# EAGLE board modulev2 (EAGLE 9.5.1)
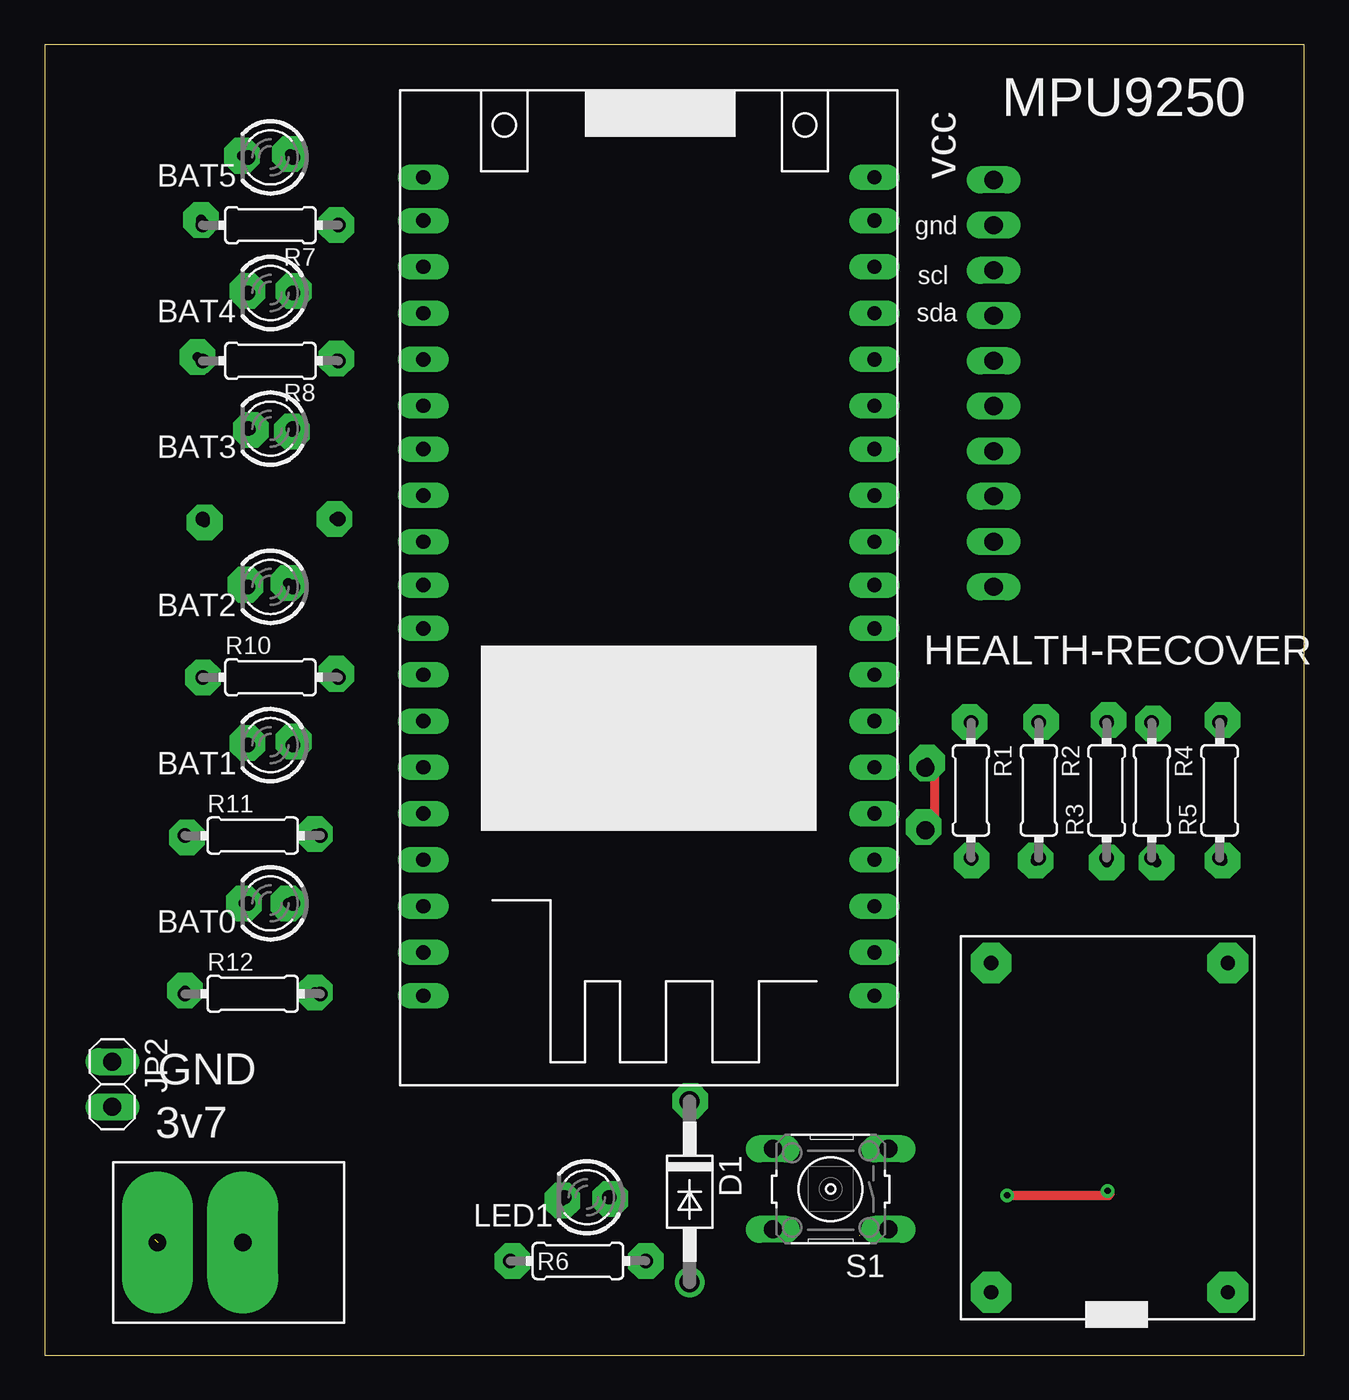
[diagram p0: board, top side]
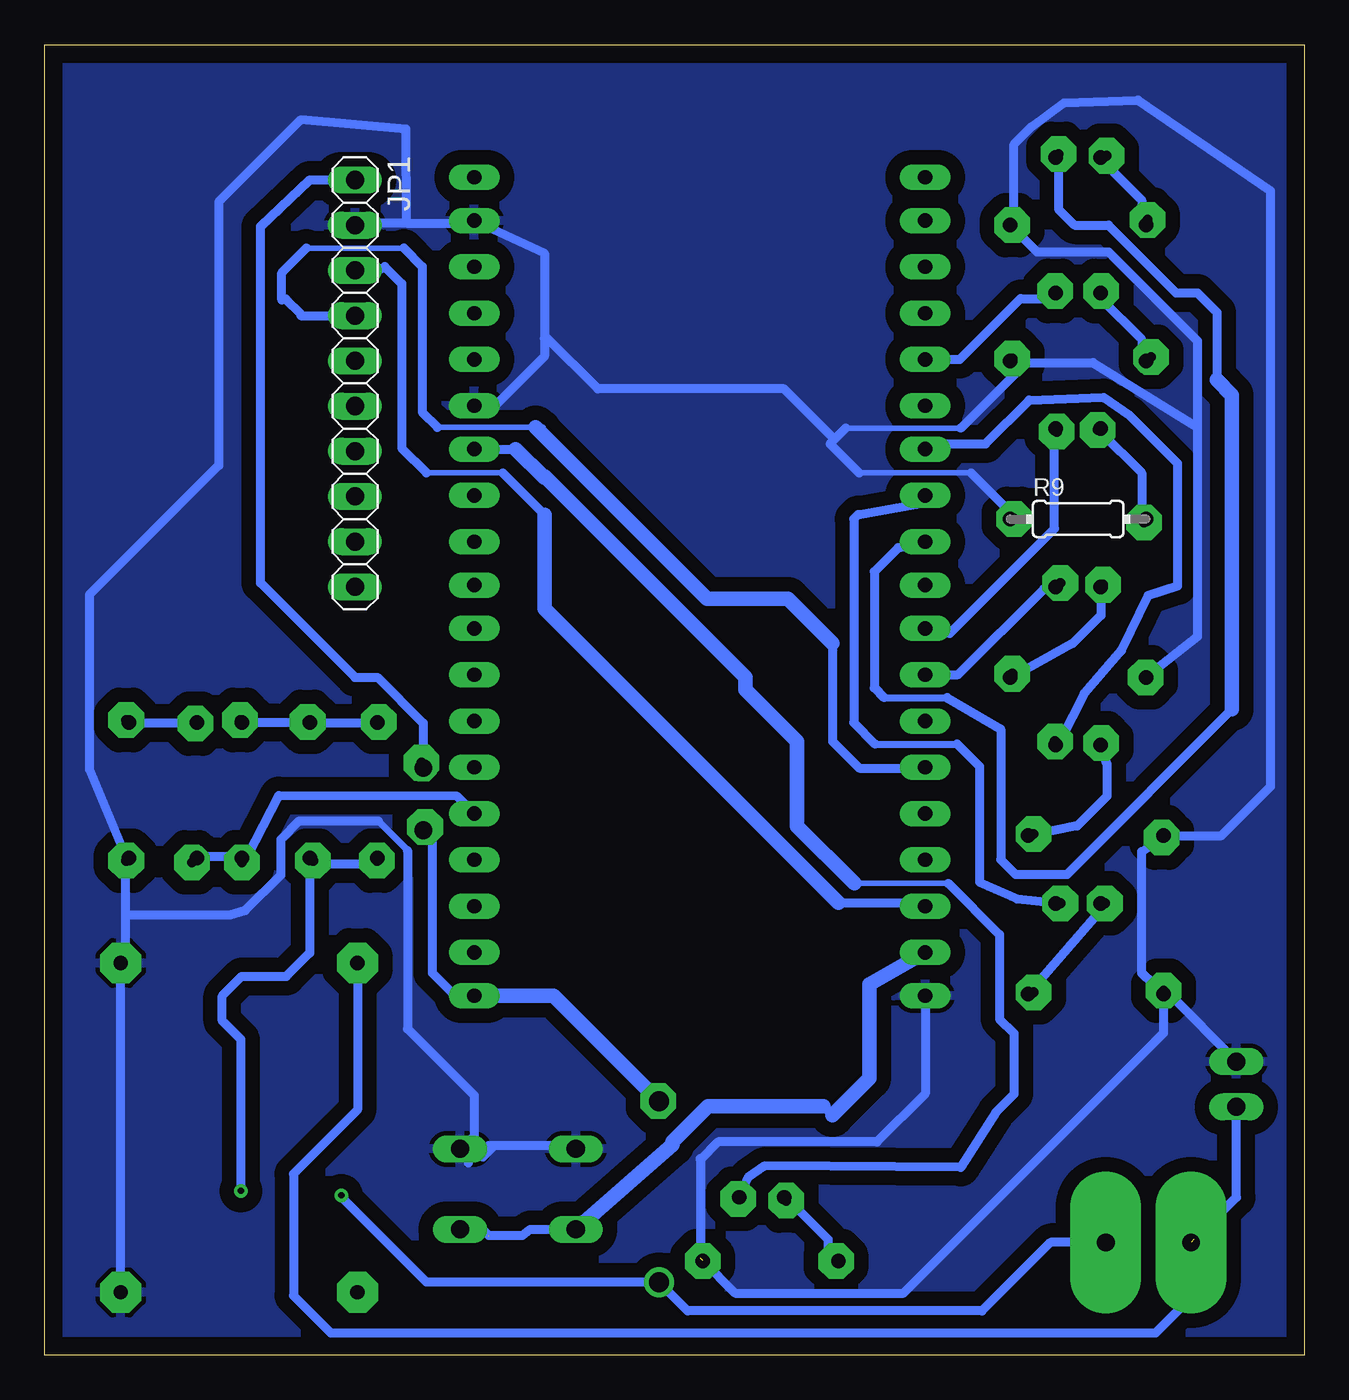
[diagram p1: board, bottom side, seen from below]

Size 70.79 x 73.65 mm. Coordinates in mm from the lower left corner, seen from the top.
Outline: 0,0 70.79,0 70.79,73.65 0,73.65 0,0
Copper layers (1*16): Top 0.035mm / dielectric 1.5mm / Bottom 0.035mm
Design rules "default": minimum track width 6mil, minimum drill 0.35mm, track to track 6mil, track to pad 6mil, pad to pad 6mil, via to via 6mil, smd to smd 6mil, copper to edge 40mil, drill to drill 6mil, minimum pad ring 10mil, minimum via ring 8mil, stop-mask expansion 4mil, vias tented up to drill 0mil, thermal gap 10mil
Net classes: 0 default: width 0.5 mm

## Footprints (pad centres in the part's own frame; a part is rotated, then mirrored left to right if it is on the bottom)
LED3MM = drill 0.813 octagon: A -1.27,0; K 1.27,0
DO41-10 = drill 1.118: A 5.08,0; C -5.08,0
1X10 = drill 1.016 long: 1 -11.43,0; 2 -8.89,0; 3 -6.35,0; 4 -3.81,0; 5 -1.27,0; 6 1.27,0; 7 3.81,0; 8 6.35,0; 9 8.89,0; 10 11.43,0
1X02 = drill 1.016 long: 1 -1.27,0; 2 1.27,0
0204/7 = drill 0.813 octagon: 1 -3.81,0; 2 3.81,0
B3F-10XX = drill 1.016 long: 1 -3.251,2.261; 2 3.251,2.261; 3 -3.251,-2.261; 4 3.251,-2.261
ESP32-WORMM2 = drill 0.8 pad 1.422 long: 1 -13,20.475; 2 -13,18.038; 3 -13,15.438; 4 -13,12.838; 5 -13,10.238; 6 -13,7.638; 7 -13,5.2; 8 -13,2.6; 9 -13,0; 10 -13,-2.438; 11 -13,-4.875; 12 -13,-7.475; 13 -13,-10.075; 14 -13,-12.675; 15 -13,-15.275; 16 -13,-17.875; 17 -13,-20.475; 18 -13,-23.075; 19 -13,-25.512; 20 12.35,-25.512; 21 12.35,-23.075; 22 12.35,-20.475; 23 12.35,-17.875; 24 12.35,-15.275; 25 12.35,-12.675; 26 12.35,-10.075; 27 12.35,-7.475; 28 12.35,-4.875; 29 12.35,-2.438; 30 12.35,0; 31 12.35,2.6; 32 12.35,5.2; 33 12.35,7.638; 34 12.35,10.238; 35 12.35,12.838; 36 12.35,15.438; 37 12.35,18.038; 38 12.35,20.475
CHARGET_MODULE = drill 0.8 pad 2.3 octagon: 1 9.15,6.81; 2 -9.35,6.81; 3 -9.35,-6.49; 4 9.15,-6.49
MINI_SWITCH = drill 1 pad 4 long: 1 0,0; 2 4.8,0

## Placement (x,y rotation side)
BAT0  led_indicator  [LED3MM]  12.7,25.4 180 top
BAT1  led_indicator  [LED3MM]  12.7,34.29 180 top
BAT2  led_indicator  [LED3MM]  12.7,43.18 180 top
BAT3  led_indicator  [LED3MM]  12.7,52.07 180 top
BAT4  led_indicator  [LED3MM]  12.7,59.69 180 top
BAT5  led_indicator  [LED3MM]  12.7,67.31 180 top
D1  1N4004  [DO41-10]  36.26,9.2 270 top
JP1  [1X10]  53.34,54.61 270 bottom
JP2  [1X02]  3.81,15.24 270 top
LED1  led_indicator  [LED3MM]  30.48,8.89 180 top
R1  33k  [0204/7]  52.07,31.75 270 top
R2  33k  [0204/7]  55.88,31.75 270 top
R3  19k  [0204/7]  59.69,31.75 90 top
R4  33k  [0204/7]  62.23,31.75 270 top
R5  33k  [0204/7]  66.04,31.75 90 top
R6  330  [0204/7]  29.98,5.31 180 top
R7  330  [0204/7]  12.7,63.5 180 top
R8  330  [0204/7]  12.7,55.88 180 top
R9  330  [0204/7]  12.7,46.99 0 bottom
R10  330  [0204/7]  12.7,38.1 0 top
R11  330  [0204/7]  11.7,29.21 0 top
R12  330  [0204/7]  11.7,20.32 0 top
S1  [B3F-10XX]  44.18,9.35 180 top
U$1  ESP32-WROMM2  [ESP32-WORMM2]  34.29,45.72 0 top
U$2  CHARGET_MODULE  [CHARGET_MODULE]  59.69,12.7 270 top
U$3  MINI_SWITCH  [MINI_SWITCH]  6.35,6.35 0 top

## Library data of the parts
BAT0 BAT1-BAT5 LED1 = led
D1 = diode
JP1 JP2 = pinhead
R1-R12 = rcl; SPICEPREFIX: R
S1 = switch-omron
U$1 = esp32-wromm2
U$2 = charget_module
U$3 = mini_switch

## Nets
3V3: D1.C JP1.1 U$1.20
3V7: JP2.2 U$2.3 U$3.1
3V7_2: D1.A R1.2 R2.2 U$3.2
ADC34: R3.1 R4.2 U$1.24
BAT0: BAT0.A U$1.8
BAT1: BAT1.A U$1.7
BAT2: BAT2.A U$1.12
BAT3: BAT3.A U$1.11
BAT4: BAT4.A U$1.5
BAT5: BAT5.A U$1.9
BUTTON: S1.1 S1.2 U$1.18
GND: JP1.2 JP2.1 R5.1 R6.1 R7.1 R8.1 R9.1 R10.1 R11.1 R12.1 S1.3 S1.4 U$1.19 U$1.33 U$1.37 U$2.1 U$2.2
LED_INDICATOR: LED1.A U$1.32
N$1: R4.1 R5.2
N$2: LED1.K R6.2
N$3: BAT5.K R7.2
N$4: R1.1 R2.1 R3.2
N$5: BAT4.K R8.2
N$7: BAT3.K R9.2
N$8: BAT2.K R10.2
N$9: BAT1.K R11.2
N$10: BAT0.K R12.2
SCL: JP1.3 U$1.17
SDA: JP1.4 U$1.14

## Tracks (layer width: path | path; a pad name or v marks a point on that pad's centre or on a via)
3V3  (via drill 1)
  Top 0.5: v49.5,33 50,32.5 50,30 v49.5,29.5
  Bottom 0.5: 42.69,20.22 46.32,20.22 U$1.20 47.71,20.21 49,21.5 49,29 v49.5,29.5 | JP1.1 55.88,66.04 58.65,63.44 58.65,43.41 53.34,38.1 52.07,38.1 49.5,35.53 v49.5,33
  Bottom 0.813: D1.C 42.19,20.21 U$1.20
3V7  (1 unrouted)
  Bottom 0.5: 3.91,13.7 JP2.2 3.81,8.89 U$3.1 6.35,6.05 6.1,5.8 | 53.5,22.18 U$2.3 53.2,13.8 56.8,10.2 56.8,3.37 54.7,1.27 8.33,1.27 6.2,3.4 6.2,6.52
3V7_2  (via drill 0.35)
  Top 0.5: v54.1,9 59.8,9 59.9,9.1 v59.75,9.25
  Bottom 0.5: 11.09,6.52 U$3.2 | 11.42,6.2 U$3.2 | R2.2 55.88,27.6 | 55.88,27.6 55.88,22.62 57.2,21.3 59.7,21.3 60.8,20.2 60.8,18.8 59.75,17.75 v59.75,9.25 | R1.2 52.41,27.6 55.88,27.6 | U$3.2 14.25,6.35 18.1,2.5 34.64,2.5 D1.A 49.32,4.12 54,8.8 54,9 v54.1,9
ADC34
  Bottom 0.5: R4.2 61.98,28.05 59.7,28.05 R3.1 59.37,28.05 57.61,31.47 47.63,31.44 U$1.24
BAT0
  Bottom 0.406: 24.11,34.35 19.5,34.35
  Bottom 0.5: 19.5,34.35 18.25,33.1 18.25,26.59 16.12,25.65 14.03,25.44 BAT0.A | 24.11,34.35 25.31,35.56 25.31,46.99 25.07,47.24 21.79,47.82 U$1.8
BAT1
  Bottom 0.5: BAT1.A 13.7,34.58 12.36,37.2 10.27,39.61 8.77,42.69 7.12,43.22 7.12,50.12 9.83,52.83 11.28,53.83 15.44,53.67 17.9,51.21 21.2,51.21 U$1.7
BAT2
  Bottom 0.5: U$1.12 19.45,38.24 14.64,43.06 14.03,43.06 BAT2.A
BAT3
  Bottom 0.5: BAT3.A 14.03,51.87 14.03,46.45 19.93,40.55 20.29,40.84 U$1.11
BAT4
  Bottom 0.5: U$1.5 19.35,55.96 15.94,59.37 14.03,59.37 BAT4.A
BAT5
  Bottom 0.406: 23.61,36.96 20.07,36.96
  Bottom 0.5: 4.05,36.29 13.31,27.03 16.23,27.03 17.05,27.85 17.05,35.19 20.07,36.96 | 23.61,36.96 24.16,37.51 24.16,44.04 22.81,45.39 U$1.9 | 13.7,67.2 BAT5.A 13.8,67.14 13.8,64.4 12.9,63.5 11,63.5 7.2,59.7 6,59.7 4.9,58.6 4.9,54.81
  Bottom 0.813: 4.05,36.29 4.05,53.96 4.9,54.81
BUTTON  (1 unrouted)
  Bottom 0.5: 24.5,20.8 24.41,20.85 | 45.82,6.74 43.94,6.74 43.49,7.09 S1.2 | S1.1 46.16,7.09 45.81,6.74 | 27,14 26.5,13.5 | 35.5,11.84 35.5,12
  Bottom 0.813: U$1.18 24.41,20.85 24.41,15.59 26.5,13.5 | 35.5,11.84 S1.2 | 35.5,12 33.5,14 27,14
GND  (1 unrouted)
  Bottom 0.305: 25.01,49.58 18.72,49.58 | 19.3,52.09 25.77,52.09
  Bottom 0.406: 52.04,30.03 50.39,28.38
  Bottom 0.5: R12.1 7.81,20.22 7.5,20.22 3.91,16.64 JP2.1 | R12.1 9.13,21.5 9.13,28.3 R11.1 4.65,29.21 1.9,31.96 1.9,65.42 9.34,70.53 13.5,70.37 15.35,69 16.31,68.05 16.31,63.61 R7.1 | 33.94,11.06 33.94,11 | 33.94,11 33.94,5.7 R6.1 31.98,3.5 22.51,3.5 7.89,18.12 R12.1 | 33.94,5.47 33.94,4.97 | S1.4 41.13,11.81 45.5,11.81 | 45.82,11.81 45.5,11.81 | 46.98,11.16 S1.3 46.65,12.33 46.65,14.62 50.39,18.36 50.39,28.38 | 46.98,11.16 46.98,10.81 | 66.22,24.75 66.22,22.18 U$2.2 66.55,21.86 66.55,3.59 U$2.1 | 66.22,24.75 66.22,27.73 R5.1 66.27,28.17 68.27,32.93 68.27,42.73 61,50 61,64.81 56.39,69.42 50.47,68.9 50.44,63.61 | 52.04,30.03 56.47,30.03 57.5,29 57.5,27 59.5,25 60.37,24.75 66.22,24.75 | 42.69,57.13 42.6,57.22 39.69,54.3 29.23,54.3 26.39,51.47 | 42.69,57.13 42.69,61.92 U$1.37 46.79,63.61 50.44,63.61 | 42.69,57.13 42.69,56.13 45.43,53.38 45.49,53.36 U$1.33 | 50.44,63.61 53.17,63.61 JP1.2 | 6,52.14 6,40.39 R10.1 | 15.61,55.78 16.31,55.78 R8.1 | 15.61,55.78 11.86,55.78 6,52.14 | R9.1 16.51,47.37 18.72,49.58 | 25.77,52.09 26.39,51.47 | 26.39,51.47 26.64,51.22 25.01,49.58 | 15.61,55.78 19.3,52.09 | 16.31,63.28 R7.1 | R7.1 15.01,62 11,62 6,57 6,52.14 | U$1.19 21.29,14.71 24,12 32.94,12 33.94,11 | 45.5,11.81 46.15,11.16 46.98,11.16
  pour Bottom (isolate 0.813, rank 2): 0,0 0,73.4 0.2,73.6 70.9,73.6 70.9,0.1 71,0 0.1,0 0,-0.1
LED_INDICATOR
  Bottom 0.305: 25.28,26.52 20,26.52
  Bottom 0.5: 20,26.52 17.11,23.64 17.11,18.9 16.31,18.09 16.31,14.68 17.29,13.7 19.3,10.57 30.32,10.65 31.25,10.01 LED1.A | 31.5,37.5 31.4,37.4 | 46.32,50.89 U$1.32 44.32,50.92
  Bottom 0.813: 25.28,26.52 28.5,29.74 28.5,34.5 31.4,37.4 31.4,38.1 42.7,49.4 42.7,49.3 44.32,50.92
N$1
  Bottom 0.5: R4.1 62.3,35.56 65.89,35.56 R5.2
N$2
  Bottom 0.5: R6.2 26.75,6.08 26.75,6.52 29.03,8.81 LED1.K
N$3
  Bottom 0.5: R7.2 9.13,63.61 9.13,64.91 11.42,67.2 BAT5.K
N$4
  Bottom 0.5: R1.1 52.19,35.56 55.78,35.56 R2.1 56.11,35.56 59.37,35.56 R3.2
N$5
  Bottom 0.5: R8.2 9.13,56.11 9.13,57.09 11.42,59.37 BAT4.K
N$6  (via drill 0.55 pad 2)
  other vias: 11.1,67.4
N$7
  Bottom 0.5: R9.2 9.13,47.3 9.13,49.58 11.42,51.87 BAT3.K
N$8
  Bottom 0.5: R10.2 16.31,38.16 13,40 11.42,41.58 11.42,43.06 BAT2.K
N$9
  Bottom 0.5: R11.2 12.74,29.75 11.08,31.42 11.08,33.23 BAT1.K
N$10
  Bottom 0.5: BAT0.K 11.43,25.02 R12.2
N$11  (via drill 0.55 pad 2)
  other vias: 13.8,67.5
N$12  (via drill 0.55 pad 2)
  other vias: 8.8,63.8
N$13  (via drill 0.55 pad 2)
  other vias: 16.4,63.5
N$14  (via drill 0.55 pad 2)
  other vias: 11.4,59.8
N$15  (via drill 0.55 pad 2)
  other vias: 14,59.8
N$16  (via drill 0.55 pad 2)
  other vias: 16.4,56
N$17  (via drill 0.55 pad 2)
  other vias: 11.6,52
N$18  (via drill 0.55 pad 2)
  other vias: 13.9,51.9
N$19  (via drill 0.55 pad 2)
  other vias: 16.3,47
N$20  (via drill 0.55 pad 2)
  other vias: 9,46.8
N$21  (via drill 0.55 pad 2)
  other vias: 8.6,56.1
N$22  (via drill 0.55 pad 2)
  other vias: 11.3,43.3
N$23  (via drill 0.55 pad 2)
  other vias: 13.7,43.4
N$24  (via drill 0.55 pad 2)
  other vias: 16.4,38.3
N$25  (via drill 0.55 pad 2)
  other vias: 8.9,38.1
N$26  (via drill 0.55 pad 2)
  other vias: 11.4,34.4
N$27  (via drill 0.55 pad 2)
  other vias: 14,34.5
N$28  (via drill 0.55 pad 2)
  other vias: 15.2,29.3
N$29  (via drill 0.55 pad 2)
  other vias: 8,29.1
N$30  (via drill 0.55 pad 2)
  other vias: 11.2,25.4
N$31  (via drill 0.55 pad 2)
  other vias: 13.7,25.4
N$32  (via drill 0.55 pad 2)
  other vias: 15.2,20.4
N$33  (via drill 0.55 pad 2)
  other vias: 7.9,20.5
N$34  (via drill 0.55 pad 2)
  other vias: 26.3,5.3
N$35  (via drill 0.55 pad 2)
  other vias: 29.1,8.7
N$36  (via drill 0.55 pad 2)
  other vias: 31.8,8.8
N$37  (via drill 0.55 pad 2)
  other vias: 33.8,5.3
N$39  (via drill 0.55 pad 2)
  other vias: 36.3,14.3
N$40  (via drill 0.55 pad 2)
  other vias: 49.4,29.7
N$41  (via drill 0.55 pad 2)
  other vias: 49.6,33.3
N$42  (via drill 0.55 pad 2)
  other vias: 52.1,27.8
N$43  (via drill 0.55 pad 2)
  other vias: 55.7,27.8
N$44  (via drill 0.55 pad 2)
  other vias: 59.7,27.7
N$45  (via drill 0.55 pad 2)
  other vias: 62.5,27.7
N$46  (via drill 0.55 pad 2)
  other vias: 66.2,27.8
N$47  (via drill 0.55 pad 2)
  other vias: 66.2,35.7
N$48  (via drill 0.55 pad 2)
  other vias: 62.3,35.5
N$49  (via drill 0.55 pad 2)
  other vias: 59.8,35.7
N$50  (via drill 0.55 pad 2)
  other vias: 56,35.6
N$51  (via drill 0.55 pad 2)
  other vias: 52,35.6
SCL
  Bottom 0.305: 49.33,49.58 45.04,49.58
  Bottom 0.5: 26.18,25.44 21.53,25.44 U$1.17 | 45.04,49.58 42.69,47.23 | 49.33,49.58 50.71,50.97 50.71,60.22 51.67,61.17 52.03,60.96 JP1.3
  Bottom 0.813: 26.18,25.44 42.69,41.95 42.69,47.23
SDA
  Bottom 0.305: 48.7,52.14 43.2,52.14 42.77,52.14 | 56.08,62.2 50.59,62.2
  Bottom 0.5: 48.7,52.14 49.56,53 49.56,61.17 50.59,62.2 | 56.08,62.2 57.45,60.83 57.45,59.3 57.22,59.35 56.4,58.52 56.38,58.42 JP1.4 | U$1.14 21.53,33.27 21.8,33 25,33 26.5,34.5 26.5,40
  Bottom 0.813: 26.5,40 29,42.5 33.56,42.5 43.2,52.14

## Text on the board
tNames: MPU9250 | vcc | gnd | scl | sda | HEALTH-RECOVER | GND | 3v7